# Altium PCB PCB1.PcbDoc
Units mm, origin at the board's own origin, x right, y up, seen from the top; angles counter-clockwise.
Board outline 44.45 x 20.32 mm, 2 copper layers (Top Layer, Bottom Layer), stack 1.569 mm thick; 4 components, 10 nets, 46 pads, 0 vias.
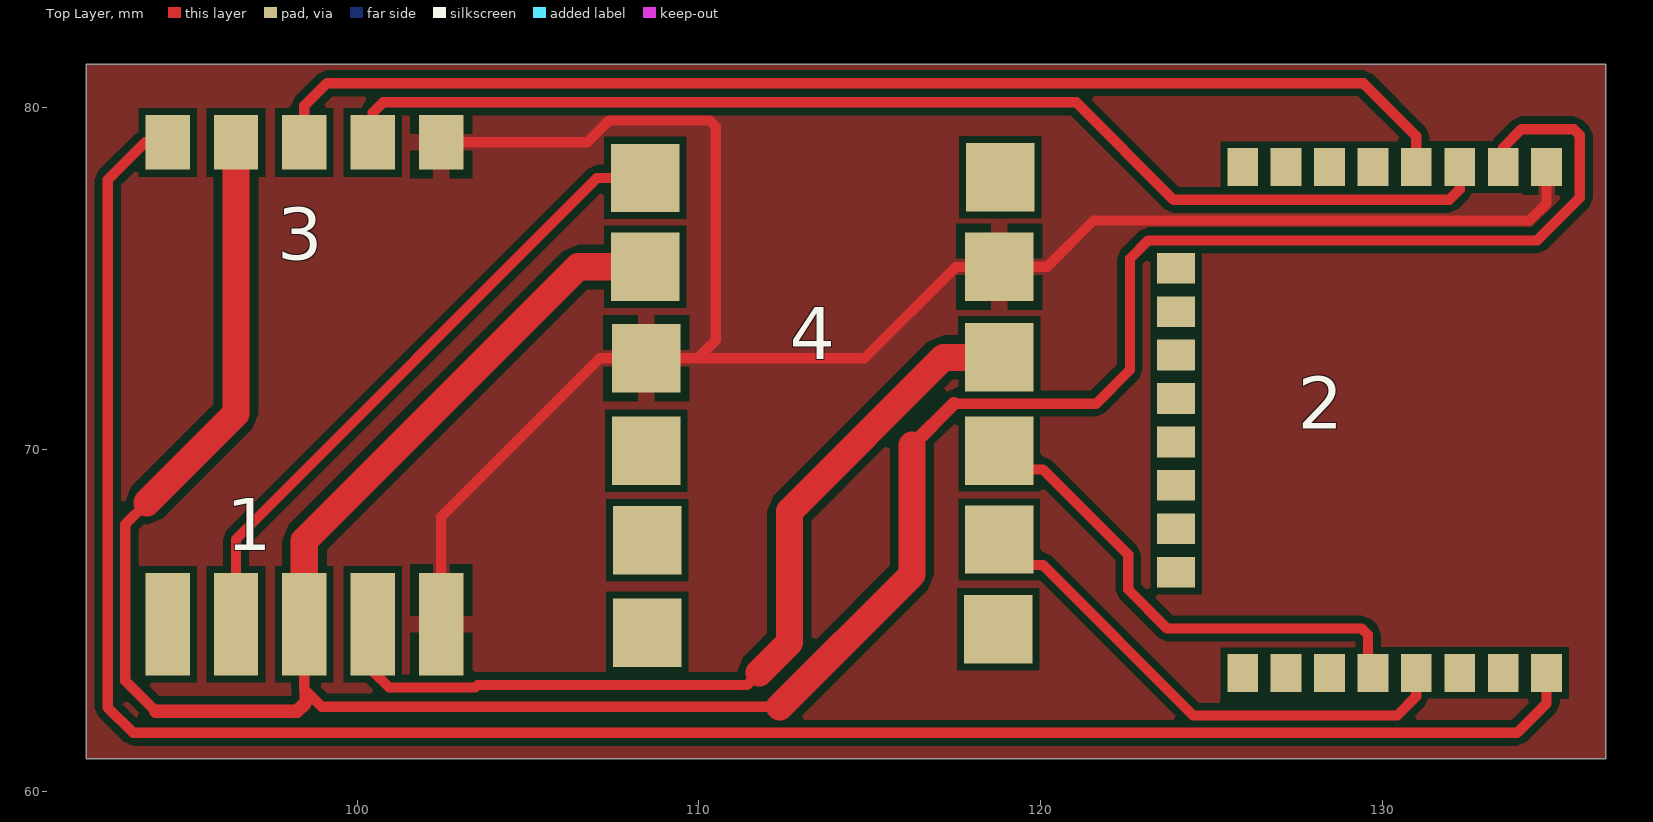
[diagram p0: Top Layer view]
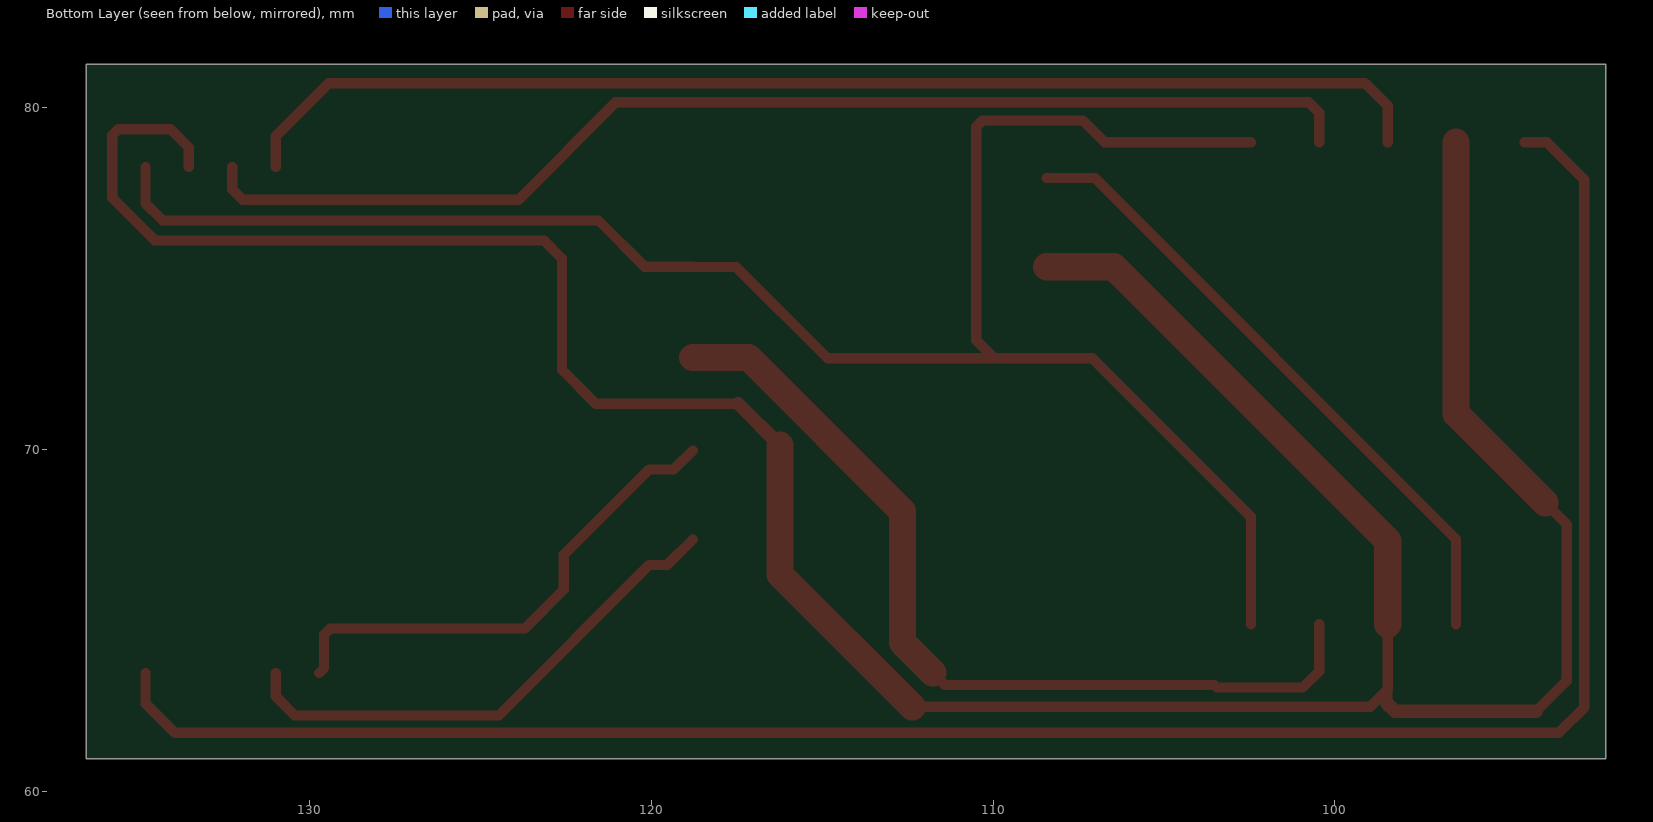
[diagram p1: Bottom Layer view, seen from below]

## Layer stack, top to bottom
Top Solder: solder mask 0.0254, SM-001, Dk 4
Top Layer: signal copper 0.035
Dielectric 1: core 1.4986, Core-043, Dk 4.3
Bottom Layer: signal copper 0.035
Bottom Solder: solder mask 0.0254, SM-001, Dk 4

## Board outline
92.075,60.96 92.075,81.28 136.525,81.28 136.525,60.96

## Design rules (kind name [scope] priority, off if disabled: settings)
Clearance [All] p1: gap=0.2 ignorepadtopadclearanceinfootprint=FALSE
MinimumSolderMaskSliver [All] p1: minsoldermaskwidth=0.1
PolygonConnect [All] p1: connectstyle=Relief reliefconductorwidth=0.5 reliefentries=4 polygonreliefangle="90 Angle" airgapwidth=0.254
RoutingLayers [All] p1: top layer_v5=TRUE bottom layer_v5=FALSE
RoutingVias [All] p1: holewidth=0.711 width=1.27 viastyle="Through Hole" minholewidth=0.711 minwidth=1.27 maxholewidth=0.711 maxwidth=1.27
SilkToSolderMaskClearance [IsPad] p1: minsilkscreentomaskgap=0.1 clearancetoexposedcopper=TRUE
SolderMaskExpansion [All] p1: expansion=0.102 istentingtop=FALSE
Width [All] p1: maxlimit=1 minlimit=0.2 preferedwidth=0.3
27 further rules are at their usual default settings.

## Components (designator, comment, footprint, x,y, rotation, side; value= is the part's Value field where it differs from the comment)
1 "Arduino connecter" Arduino 102.457,64.872 r90 top
2 "CC2530" CC2530 134.792,63.471 r90 top
3 "DEBUG" DEBUG 94.457,78.994 r270 top
4 "LLV" LLV 107.083,63.427 r0 top

## Footprints (in the part's own frame and the unit in brackets; to place one, negate y for a bottom-side part, rotate by r counter-clockwise, add the part's x,y. Pads: shape width x height; smd on the part's side, far side on the other; paste and mask are expansions set on the pad)
Arduino [mm]
  rect 3x1.3 smd: 49(0.025,8) 50(0.025,6) 51(0.025,4) 52(0.025,2) 53(0.025,0)
CC2530 [mm]
  rect 1.1x0.9 smd: 5(14.8,0) 6(14.8,1.27) 7(14.8,2.54) 8(14.8,3.81) 9(14.8,5.08) 10(14.8,6.35) 11(14.8,7.62) 12(14.8,8.89) 21(0,8.89) 22(0,7.62) 23(0,6.35) 24(0,5.08) 25(0,3.81) 26(0,2.54) 27(0,1.27) 28(0,0)
  rect 0.9x1.1 smd: 13(11.84,10.84) 14(10.57,10.84) 15(9.3,10.84) 16(8.03,10.84) 17(6.76,10.84) 18(5.49,10.84) 19(4.22,10.84) 20(2.95,10.84)
DEBUG [mm]
  rect 1.6x1.3 smd: 29(0,8) 30(0,6) 31(0,4) 32(0,0) 33(0,2)
LLV [mm]
  rect 2x2 smd: 54(1.35,14.525) 55(1.35,11.925) 56(1.375,9.25) 57(1.375,6.55) 58(1.4,3.925) 59(1.4,1.225) 60(11.725,14.55) 61(11.7,11.925) 62(11.7,9.275) 63(11.7,6.55) 64(11.7,3.95) 65(11.675,1.325)

## Nets (pads, with @x,y where several pads share a name; then routed paths per layer and width w, separated by ;. In a path a pad name is that pad's centre, name@x,y a point inside that pad or via, vN(x,y) a via of type N, cw(c..) or ccw(c..) an arc to the next point about the centre after c; other vN are vias at no path point)
GND: 1.53 2.5 3.29 4.56 4.61 | length 55.7
  Top Layer w0.3: 1.53 102.457,68.04 107.094,72.677 109.962,72.677 ; 3.29 106.731,78.994 107.366,79.629 110.314,79.629 110.49,79.453 110.49,73.205 109.962,72.677 ; 2.5 134.792,77.216 134.284,76.708 121.539,76.708 120.183,75.352 4.61 118.776,75.345 117.509,75.345 114.841,72.677 109.962,72.677
Net1_49: 1.49
Net1_50: 1.50 4.54 | length 18.8
  Top Layer w0.3: 1.50 96.457,67.386 107.023,77.952 4.54
Net1_51: 1.51 2.6 3.33 4.55 | length 93.6
  Top Layer w0.3: 93.853,68.453 93.218,67.818 93.218,63.246 94.107,62.357 ; 1.51 98.457,62.992 98.965,62.484 112.362,62.484 ; 98.46,62.568 98.46,62.989 ; 117.45,71.349 121.615,71.349 122.606,72.339 122.606,75.59 123.139,76.124 134.518,76.124 135.763,77.368 135.763,79.199 135.587,79.375 134.055,79.375 133.522,78.842 2.6
  Top Layer w0.4: 94.107,62.357 98.249,62.357 98.46,62.568 ; 116.23,70.129 117.45,71.349
  Top Layer w0.8: 93.853,68.453 96.457,71.057 3.33 ; 1.51 98.457,67.342 106.467,75.352 4.55 ; 112.362,62.484 116.23,66.352 116.23,70.129
Net1_52: 1.52 4.62 | length 26.1
  Top Layer w0.3: 1.52 100.457,63.525 100.935,63.047 103.457,63.047 103.529,63.119 111.401,63.119 111.76,63.478
  Top Layer w0.8: 111.76,63.478 112.649,64.367 112.649,68.199 117.152,72.702 4.62
Net2_7: 2.7 3.30 | length 34.7
  Top Layer w0.3: 3.30 100.457,79.858 100.762,80.162 121.031,80.162 123.876,77.318 131.947,77.318 132.252,77.622 2.7
Net2_8: 2.8 3.31 | length 35.4
  Top Layer w0.3: 3.31 98.457,80.061 99.117,80.721 129.433,80.721 130.982,79.172 2.8
Net2_24: 2.24 4.63 | length 14.8
  Top Layer w0.3: 4.63 119.333,69.427 120.057,69.427 122.555,66.929 122.555,65.913 123.698,64.77 129.391,64.77 129.567,64.594 129.567,63.616 2.24
Net2_25: 2.25 4.64 | length 15.2
  Top Layer w0.3: 4.64 119.527,66.633 120.057,66.633 124.46,62.23 130.423,62.23 130.982,62.789 2.25
Net2_28: 2.28 3.32 | length 61.3
  Top Layer w0.3: 3.32 93.802,78.994 92.71,77.902 92.71,62.461 93.449,61.722 133.928,61.722 134.792,62.586 2.28
pads on no net: 2.9 2.10 2.11 2.12 2.13 2.14 2.15 2.16 2.17 2.18 2.19 2.20 2.21 2.22 2.23 2.26 2.27 4.57 4.58 4.59 4.60 4.65

## Polygon pours and split planes (outlines as drawn)
GND on Top Layer "GND_L01_P000" (solid, pour order 0): 92.075,81.28 92.075,60.96 136.525,60.96 136.525,81.28

## Silkscreen, mask and mechanical layers (free items; w line width, h text height)
Mechanical 1:
  the board outline again, w0.254